# Altium PCB Slave_PCB.PcbDoc
Units mm, origin at the board's own origin, x right, y up, seen from the top; angles counter-clockwise.
Board outline 15 x 70 mm, 2 copper layers (Top Layer, Bottom Layer); 58 components, 46 nets, 211 pads, 250 vias.
Unrouted connection lines stored in the file: 1.
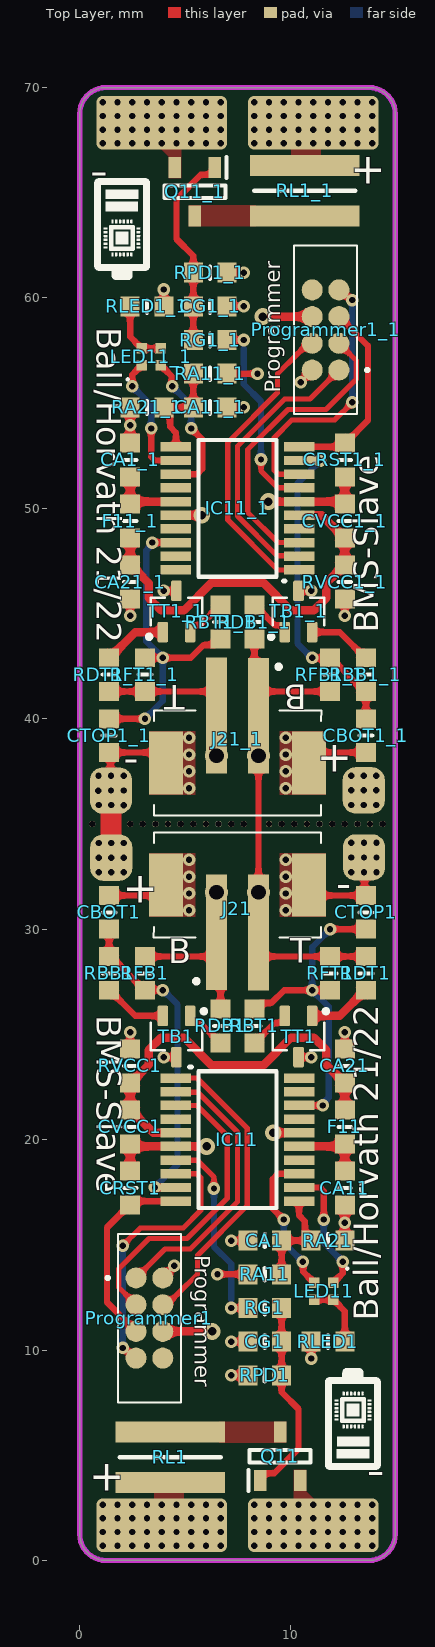
[diagram p0: Top Layer view]
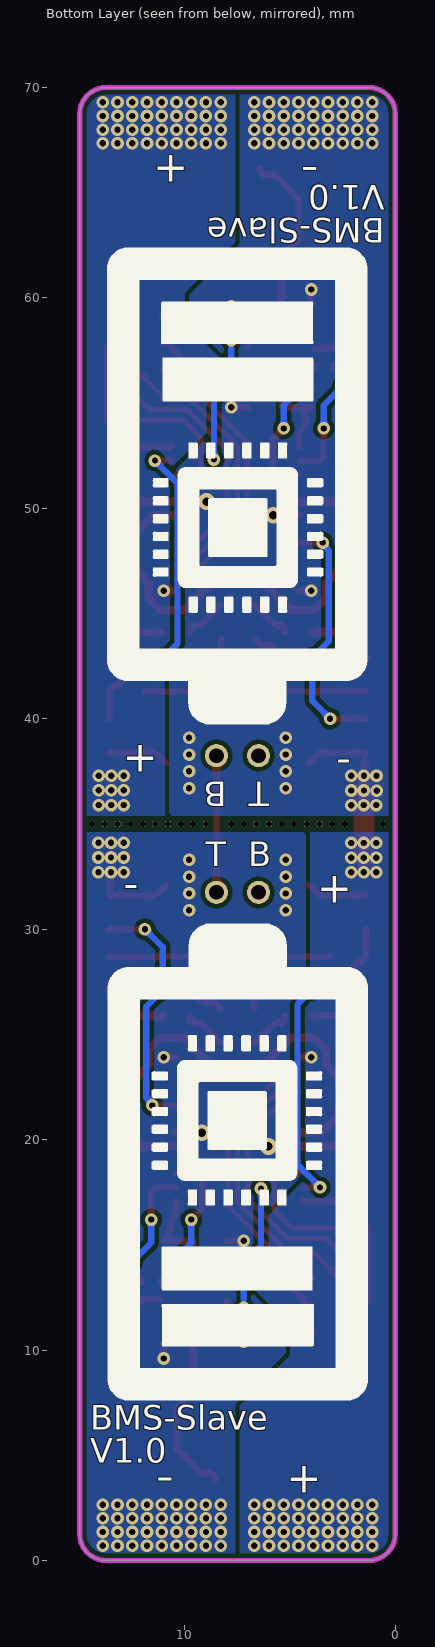
[diagram p1: Bottom Layer view, seen from below]
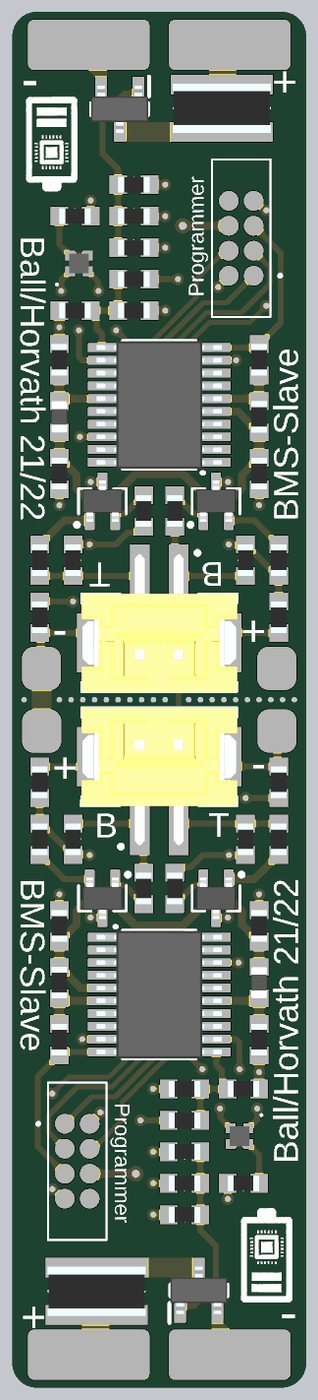
[diagram p2: 3D render of the assembled board from above, using the file's embedded part models]

## Layer stack, top to bottom
Top Solder: solder mask 0.0102, Solder Resist, Dk 3.5
Top Layer: signal copper 0.0356
Dielectric 1: dielectric 0.32, FR-4, Dk 4.8
Bottom Layer: signal copper 0.0356
Bottom Solder: solder mask 0.0102, Solder Resist, Dk 3.5

## Board outline
0,1.25 0,35 0,68.7 0,68.75 cw(c1.25,68.75) 1.25,70 13.75,70 cw(c13.75,68.75) 15,68.75 15,35 15,1.3 15,1.25 cw(c13.75,1.25) 13.75,0 1.25,0 cw(c1.25,1.25)

## Design rules (kind name [scope] priority, off if disabled: settings)
BoardOutlineClearance [All] p1: gap=0.2 ignorepadtopadclearanceinfootprint=FALSE except(0.4: Arc-SplitBarrior Arc-SplitContinuation Track-SplitBarrior Track-SplitContinuation SMDPad-SplitBarrior SMDPad-SplitContinuation THPad-SplitBarrior THPad-SplitContinuation Via-SplitBarrior Via-SplitContinuation Fill-SplitBarrior Fill-SplitContinuation Poly-SplitBarrior Poly-SplitContinuation Region-SplitBarrior Region-SplitContinuation Text-SplitBarrior Text-SplitContinuation)
Clearance "Stitching GND" [IsStitchingVia and InNet('GND') vs (IsVia and (Not IsStitchingVia)) Or IsPad] p1: gap=0.127 ignorepadtopadclearanceinfootprint=FALSE
Clearance "Clearance Bottom Layer" [OnLayer('Bottom Layer')] p2: gap=0.203 ignorepadtopadclearanceinfootprint=TRUE except(0.254: Arc-Text Track-Text SMDPad-Text THPad-Text Via-Text Fill-Text Poly-Text Region-Text Text-Text)
Clearance "Clearance Top Layer" [OnLayer('Top Layer')] p3: gap=0.203 ignorepadtopadclearanceinfootprint=TRUE except(0.254: Arc-Text Track-Text SMDPad-Text THPad-Text Via-Text Fill-Text Poly-Text Region-Text Text-Text)
Clearance [All] p4: gap=0.2 ignorepadtopadclearanceinfootprint=FALSE except(0.089: Arc-Arc Arc-Track Arc-SMDPad Track-Track Track-SMDPad SMDPad-SMDPad; 0.127: Arc-Via Track-Via SMDPad-Via THPad-Via Via-Via; 0.254: Arc-Text Track-Text SMDPad-Text THPad-Text Via-Text Fill-Text Poly-Text Region-Text Text-Text)
HoleSize [All] p1: absolutevalues=TRUE maxlimit=6.3 minlimit=0.2 maxpercent=80.000 minpercent=20.000
MinimumAnnularRing [All] p1: minimumring=0.076
MinimumSolderMaskSliver [All] p1: minsoldermaskwidth=0.1
PlaneConnect [All] p1: planeconnectstyle=Direct reliefexpansion=0.508 reliefentries=4 reliefconductorwidth=0.254 reliefairgap=0.254
PolygonConnect PolygonConnect_1 [All] p1: connectstyle=Direct reliefconductorwidth=0.508 reliefentries=4 polygonreliefangle="90 Angle" airgapwidth=0.254
RoutingCorners [All] p1: cornerstyle=Round minsetback=2.54 maxsetback=2.54
RoutingVias [All] p1: holewidth=0.5 width=1 viastyle="Through Hole" minholewidth=0.2 minwidth=0.45 maxholewidth=1 maxwidth=2
SilkToSilkClearance [All] p1: silktosilkclearance=0.1
SilkToSolderMaskClearance [IsPad] p1: minsilkscreentomaskgap=0.1 clearancetoexposedcopper=TRUE
SolderMaskExpansion [All] p1: expansion=0.05 istentingtop=FALSE
Width [All] p1: maxlimit=2.54 minlimit=0.089 preferedwidth=0.3
24 further rules are at their usual default settings.

## Classes and differential pairs
component class Slave_Schematic2: CA1_1 CA11_1 CA21_1 CBOT1_1 CG1_1 CRST1_1 CTOP1_1 CVCC1_1 F11_1 IC11_1 J21_1 LED11_1 Programmer1_1 Q11_1 RA11_1 RA21_1 RBB1_1 RBT1_1 RDB1_1 RDT1_1 RFB1_1 RFT1_1 RG1_1 RL1_1 RLED1_1 RPD1_1 RVCC1_1 TB1_1 TT1_1
component class Slave_Schematic: CA1 CA11 CA21 CBOT1 CG1 CRST1 CTOP1 CVCC1 F11 IC11 J21 LED11 Programmer1 Q11 RA11 RA21 RBB1 RBT1 RDB1 RDT1 RFB1 RFT1 RG1 RL1 RLED1 RPD1 RVCC1 TB1 TT1

## Components (designator, comment, footprint, x,y, rotation, side; value= is the part's Value field where it differs from the comment)
CA1 "Cap" 0603 8.8,15.2 r0 top value=100nF
CA1_1 "Cap" 0603 2.4,52.3 r270 top value=100pF (schematic designator CA12)
CA11 "Cap" 0603 12.6,17.7 r90 top value=100pF
CA11_1 "Cap" 0603 6.2,54.8 r180 top value=100nF (schematic designator CA2)
CA21 "Cap" 0603 12.6,23.5 r270 top value=100nF
CA21_1 "Cap" 0603 2.4,46.5 r90 top value=100nF (schematic designator CA22)
CBOT1 "Cap" 0603 1.4,30.8 r270 top value=100pF
CBOT1_1 "Cap" 0603 13.6,39.2 r90 top value=100pF (schematic designator CBOT2)
CG1 "Cap" 0603 8.8,10.4 r0 top value=100nF
CG1_1 "Cap" 0603 6.2,59.6 r180 top value=100nF (schematic designator CG2)
CRST1 "Cap" 0603 2.4,17.7 r270 top value=100nF
CRST1_1 "Cap" 0603 12.6,52.3 r90 top value=100nF (schematic designator CRST2)
CTOP1 "Cap" 0603 13.6,30.8 r270 top value=100pF
CTOP1_1 "Cap" 0603 1.4,39.2 r90 top value=100pF (schematic designator CTOP2)
CVCC1 "Cap" 0603 2.4,20.6 r90 top value=100nF
CVCC1_1 "Cap" 0603 12.6,49.4 r270 top value=100nF (schematic designator CVCC2)
F11 "BLM18" "0603 - BLM18AG102BH1D" 12.6,20.6 r90 top
F11_1 "BLM18" "0603 - BLM18AG102BH1D" 2.4,49.4 r270 top (schematic designator F12)
IC11 "ATTINY261A-SU" "TSSOP-20T (MO-153 AC)" 7.5,20 r0 top
IC11_1 "ATTINY261A-SU" "TSSOP-20T (MO-153 AC)" 7.5,50 r180 top (schematic designator IC12)
J21 "B2B-PH-SM4-TB_LF__SN_" JST-PHR 7.5,32.1 r0 top
J21_1 "B2B-PH-SM4-TB_LF__SN_" JST-PHR 7.5,37.9 r180 top (schematic designator J22)
LED11 "SML-P24" "1010 LED" 11.6,12.8 r180 top
LED11_1 "SML-P24" "1010 LED" 3.4,57.2 r0 top (schematic designator LED12)
Programmer1 "Connector 2x4" "PADS 2X4" 2.68,13.425 r270 top
Programmer1_1 "Connector 2x4" "PADS 2X4" 12.32,56.575 r90 top (schematic designator Programmer2)
Q11 "XP234N0801TR-G" "SOT-23 (TO-236)" 9.525,4.95 r90 top
Q11_1 "XP234N0801TR-G" "SOT-23 (TO-236)" 5.475,65.05 r270 top (schematic designator Q12)
RA11 "Res" 0603 8.8,13.6 r180 top value=100K
RA11_1 "Res" 0603 6.2,56.4 r0 top value=100K (schematic designator RA12)
RA21 "Res" 0603 11.8,15.2 r180 top value=100K
RA21_1 "Res" 0603 3.2,54.8 r0 top value=100K (schematic designator RA22)
RBB1 "Res" 0603 1.4,27.9 r270 top value=470K
RBB1_1 "Res" 0603 13.6,42.1 r90 top value=470K (schematic designator RBB2)
RBT1 "Res" 0603 8.3,25.4 r270 top value=470K
RBT1_1 "Res" 0603 6.7,44.6 r90 top value=470K (schematic designator RBT2)
RDB1 "Res" 0603 6.7,25.4 r270 top value=10K
RDB1_1 "Res" 0603 8.3,44.6 r90 top value=10K (schematic designator RDB2)
RDT1 "Res" 0603 13.6,27.9 r90 top value=10K
RDT1_1 "Res" 0603 1.4,42.1 r270 top value=10K (schematic designator RDT2)
RFB1 "Res" 0603 3.1,27.9 r90 top value=100K
RFB1_1 "Res" 0603 11.9,42.1 r270 top value=100K (schematic designator RFB2)
RFT1 "Res" 0603 11.9,27.9 r90 top value=100K
RFT1_1 "Res" 0603 3.1,42.1 r270 top value=100K (schematic designator RFT2)
RG1 "Res" 0603 8.8,12 r0 top value=1k
RG1_1 "Res" 0603 6.2,58 r180 top value=1k (schematic designator RG2)
RL1 "Res" "1020 (REVERSED)" 4.3,4.9 r270 top value=36R
RL1_1 "Res" "1020 (REVERSED)" 10.7,65.1 r90 top value=36R (schematic designator RL2)
RLED1 "Res" 0603 11.8,10.4 r0 top value=1k
RLED1_1 "Res" 0603 3.2,59.6 r180 top value=1k (schematic designator RLED2)
RPD1 "Res" 0603 8.8,8.8 r0 top value=100k
RPD1_1 "Res" 0603 6.2,61.2 r180 top value=100k (schematic designator RPD2)
RVCC1 "Res" 0603 2.4,23.5 r90 top value=47R
RVCC1_1 "Res" 0603 12.6,46.5 r270 top value=47R (schematic designator RVCC2)
TB1 "BC585BWT1G" "SOT-323 (SC-70)" 4.6,24.9 r270 top
TB1_1 "BC585BWT1G" "SOT-323 (SC-70)" 10.4,45.1 r90 top (schematic designator TB2)
TT1 "PDTC143TU" "SOT-323 (SC-70)" 10.4,24.9 r270 top
TT1_1 "PDTC143TU" "SOT-323 (SC-70)" 4.6,45.1 r90 top (schematic designator TT2)

## Footprints (in the part's own frame and the unit in brackets; to place one, negate y for a bottom-side part, rotate by r counter-clockwise, add the part's x,y. Pads: shape width x height; smd on the part's side, far side on the other; paste and mask are expansions set on the pad)
0603 [mm] "1608 Metric"
  rect 0.9x0.95 smd: 1(-0.8,0) 2(0.8,0)
  silkscreen extent 0,-0.3 0,0.3, body extent -0.8,-0.4 0.8,0.4, height 0.55
"0603 - BLM18AG102BH1D" [mm]
  rect 0.9x0.95 smd: 1(-0.8,0) 2(0.8,0)
  silkscreen extent 0,-0.3 0,0.3, body extent -0.8,-0.4 0.8,0.4, height 0.8
"1010 LED" [mm] "SMLP24MUWT86R"
  rect 0.5x0.5 smd: 1(-0.45,-0.4) 2(0.45,-0.4) 3(0.45,0.4) 4(-0.45,0.4)
  silkscreen extent -1.17,-1.12 -1.07,-1.02, body extent -0.5,-0.5 0.5,0.5, height 0.35
"1020 (REVERSED)" [mm]
  rect 1x5.2 smd: 1(-1.2,0) 2(1.2,0)
  silkscreen extent 0,-2.4 0,2.4, body extent -1.25,-2.5 1.25,2.5, height 0.73
JST-PHR [mm]
  rect 1x5.5 smd: 1(-1,-2.25) 2(0.991,-2.261)
  rect 1.6x3 smd: 3(-3.4,0) 4(3.4,0)
  silkscreen extent -4,-4.67 3.98,2.5, body extent -3.97,-4.5 3.97,2.5, height 6.8
"PADS 2X4" [mm]
  round 1 smd: 1(0,0) 2(0,1.27) 3(1.27,0) 4(1.27,1.27) 5(2.54,0) 6(2.54,1.27) 7(3.81,0) 8(3.81,1.27)
  silkscreen extent -2.09,-1.4 5.91,2.13
"SOT-23 (TO-236)" [mm]
  rect 1x0.6 smd: 1(-1.15,0.95) 2(-1.15,-0.95) 3(1.15,0)
  silkscreen extent -1.65,-1.45 0.3,1.5, body extent -1.2,-1.45 1.2,1.45, height 1.15
"SOT-323 (SC-70)" [mm]
  rrect25% 0.97x0.5 smd: 1(-0.98,0.65) 2(-0.98,-0.65) 3(0.98,0)
  silkscreen extent -1.3,-1.22 0.65,1.4, body extent -1.05,-1 1.05,1, height 1.1
"TSSOP-20T (MO-153 AC)" [mm]
  rect 1.45x0.45 smd: 1(-2.925,2.925) 2(-2.925,2.275) 3(-2.925,1.625) 4(-2.925,0.975) 5(-2.925,0.325) 6(-2.925,-0.325) 7(-2.925,-0.975) 8(-2.925,-1.625) 9(-2.925,-2.275) 10(-2.925,-2.925) 11(2.925,-2.925) 12(2.925,-2.275) 13(2.925,-1.625) 14(2.925,-0.975) 15(2.925,-0.325) 16(2.925,0.325) 17(2.925,0.975) 18(2.925,1.625) 19(2.925,2.275) 20(2.925,2.925)
  silkscreen extent -2.26,-3.25 1.85,3.45, body extent -3.2,-3.25 3.2,3.25, height 1.2

## Part data
CA1 CA1_1 CA11 CA11_1 CA21 CA21_1 CBOT1 CBOT1_1 CG1 CG1_1 CRST1 CRST1_1 CTOP1 CTOP1_1 CVCC1 CVCC1_1: "Capacitor", LatestRevisionDate=17-Jul-2002, LatestRevisionNote="Re-released for DXP Platform.", PackageDescription="Radial Cap, Thru-Hole; 2 Leads; 0.3 in Pin Spacing", PackageReference=RAD-0.3, Published=8-Jun-2000, Publisher="Altium Limited"
F11 F11_1: "Filter"
IC11 IC11_1: "Integrated Circuit", Manufacturer_Name=Microchip, Mouser Part Number=556-ATTINY261A-SU, Arrow Part Number=ATTINY261A-SU, Arrow Price/Stock=https://www.arrow.com/en/products/attiny261a-su/microchip-technology, Datasheet Link=http://www.atmel.com/Images/doc8197.pdf, Height=2.65mm, Manufacturer_Part_Number=ATTINY261A-SU, Mouser Price/Stock=https://www.mouser.co.uk/ProductDetail/Microchip-Technology-Atmel/ATTINY261A-SU?qs=LHmEVA8xxfYkt4Dy%2F2AOtw%3D%3D
J21 J21_1: "Connector", Manufacturer_Name="JST (JAPAN SOLDERLESS TERMINALS)", Manufacturer_Part_Number=B2B-PH-SM4-TB(LF)(SN), Datasheet Link=http://www.jst-mfg.com/product/pdf/eng/ePH.pdf, Height=6.6mm
LED11 LED11_1: "Dual Color LED", Manufacturer_Name="ROHM Semiconductor", Manufacturer_Part_Number=SML-P24MUWT86R, Mouser Part Number=755-SML-P24MUWT86R, Datasheet Link=https://www.rohm.com/datasheet/SML-P24MUW(R)/sml-p24muw-e, Height=0.25mm, Mouser Price/Stock=https://www.mouser.co.uk/ProductDetail/ROHM-Semiconductor/SML-P24MUWT86R?qs=SP2aZMzhwxgr8eZ6SbTI9w%3D%3D
Programmer1 Programmer1_1: "Connector 1,27mm", Manufacturer_Name=Mill-Max, Manufacturer_Part_Number=855-22-008-10-001101, Mouser Part Number=575-855-22-008-10, Datasheet Link=https://componentsearchengine.com/Datasheets/2/855-22-008-10-001101.pdf, Height=6.27mm, Mouser Price/Stock=https://www.mouser.co.uk/ProductDetail/Mill-Max/855-22-008-10-001101?qs=mPCt1EmoOdQMosTdRU7w4Q%3D%3D
Q11 Q11_1: "MOSFET (N-Channel)", Manufacturer_Name=Torex, Mouser Part Number=865-XP234N0801TR-G, Datasheet Link=https://4donline.ihs.com/images/VipMasterIC/IC/TOSL/TOSL-S-A0008892481/TOSL-S-A0008892481-1.pdf?hkey=CECEF36DEECDED6468708AAF2E19C0C6, Height=1.15mm, Manufacturer_Part_Number=XP234N0801TR-G, Mouser Price/Stock=https://www.mouser.co.uk/ProductDetail/Torex-Semiconductor/XP234N0801TR-G?qs=BJlw7L4Cy7%252BWe%2FbHvnXcKQ%3D%3D
RA11 RA11_1 RA21 RA21_1 RBB1 RBB1_1 RBT1 RBT1_1 RDB1 RDB1_1 RDT1 RDT1_1 RFB1 RFB1_1 RFT1 RFT1_1 RG1 RG1_1 RL1 RL1_1 RLED1 RLED1_1 RPD1 RPD1_1 RVCC1 RVCC1_1: "Resistor", LatestRevisionDate=17-Jul-2002, LatestRevisionNote="Re-released for DXP Platform.", PackageDescription="Axial Device, Thru-Hole; 2 Leads; 0.4 in Pin Spacing", PackageReference=AXIAL-0.4, Published=8-Jun-2000, Publisher="Altium Limited"
TB1 TB1_1: "PNP", LatestRevisionDate=29-May-2009, LatestRevisionNote="IPC-7351 Footprint Added.", PackageDescription="3-Pin SOT-23 Package 0.95 mm Pitch, 2.4 mm Lead Span", PackageReference=SOT-23B, PackageVersion=Aug-1999, Published=8-Jun-2000, Publisher="Altium Limited"
TT1 TT1_1: "NPN", Code_JEDEC=TO-226-AA, LatestRevisionDate=17-Jul-2002, LatestRevisionNote="Re-released for DXP Platform.", PackageDescription="TO, Flat Index; 3 In-Line, Axial Leads; Body Dia. 4.8mm; Leads 0.55 x 0.51 mm (max)", PackageReference=TO-226-AA, Published=8-Jun-2000, Publisher="Altium Limited"

## Free pads (board coordinates)
  round 0.3 hole 0.3 unplated mask+0: 2(0.6,35) 2(2.4,35) 2(3,35) 2(3.6,35) 2(4.2,35) 2(4.8,35) 2(5.4,35) 2(6,35) 2(6.6,35) 2(7.2,35) 2(7.8,35) 2(9,35) 2(9.6,35) 2(10.2,35) 2(10.8,35) 2(11.4,35) 2(12,35) 2(12.6,35) 2(13.2,35) 2(13.8,35) 2(14.4,35)
  round 1.1 hole 0.7: 3(6.5,31.75) 3(6.5,38.25) 3(8.5,31.75) 3(8.5,38.25)
  rrect60% 2x2.2 smd: ""(1.491,36.589) ""(1.5,33.4) ""(13.5,36.6) ""(13.509,33.411)
  rrect25% 6.2x2.55 smd: ""(3.9,1.68) ""(3.9,68.32) ""(11.1,1.68) ""(11.1,68.32)

## Via types
v1: diameter 0.6, hole 0.3, Top Layer to Bottom Layer, tented both sides, 244 vias
v2: diameter 0.8, hole 0.4, Top Layer to Bottom Layer, tented both sides, 6 vias

## Nets (pads, with @x,y where several pads share a name; then routed paths per layer and width w, separated by ;. In a path a pad name is that pad's centre, name@x,y a point inside that pad or via, vN(x,y) a via of type N, cw(c..) or ccw(c..) an arc to the next point about the centre after c; other vN are vias at no path point)
AVCCBOT: CA11.2 F11.1 IC11.15 | length 3.5
  Top Layer w0.4: IC11.15 12.475,19.675 F11.1 CA11.2
AVCCTOP: CA1_1.2 F11_1.1 IC11_1.15 | length 3.5
  Top Layer w0.4: CA1_1.2 F11_1.1 2.525,50.325 IC11_1.15
Balancing1: IC11.7 RG1.1 | length 9.1
  Top Layer w0.254: IC11.7 5.575,19.025 6.38,18.22 v1(6.38,17.677)
  Top Layer w0.3: v1(7.2,12) RG1.1 ; RG1.1@8,12.3 RG1.1@8,12.325
  Bottom Layer w0.3: v1(6.38,17.677) 6.38,14.92 7.2,14.1 7.2,12.4
Balancing2: IC11_1.7 RG1_1.1 | length 9.1
  Top Layer w0.254: v1(8.62,52.323) 8.62,51.78 9.425,50.975 IC11_1.7
  Top Layer w0.3: RG1_1.1@7,57.675 RG1_1.1@7,57.7 ; RG1_1.1 v1(7.8,58)
  Bottom Layer w0.3: 7.8,57.6 7.8,55.9 8.62,55.08 v1(8.62,52.323)
Bot-RTX: J21.1 pad.3@6.5,31.75 RDB1.1 RFB1.2 | length 8.1
  Top Layer w0.3: RFB1.2 6.15,28.7 6.5,29.05 J21.1 6.7,29.65 RDB1.1
Bot-Slave: CBOT1.2 IC11.9 RBB1.1 RFB1.1 | length 15.5
  Top Layer w0.3: CBOT1.2 RBB1.1 1.7,28.4 1.775,28.4 3.075,27.1 RFB1.1 3.125,27.125 v1@3.95,27.125 ; v1(3.576,17.728) 3.577,17.727 4.373,17.727 IC11.9@4.375,17.725
  Bottom Layer w0.3: v1(3.576,17.728) 4.65,18.803 4.65,26.425 v1@3.95,27.125
  other v1: 3.95,27.1
Cell_Voltage1: CA1.2 IC11.11 RA11.1 RA21.2 | length 5.1
  Top Layer w0.3: RA11.1 CA1.2 RA21.2 10.7,15.5 10.7,16.125 10.425,16.4 IC11.11
Cell_Voltage2: CA11_1.2 IC11_1.11 RA11_1.1 RA21_1.2 | length 5.1
  Top Layer w0.3: IC11_1.11 4.575,53.6 4.3,53.875 4.3,54.5 RA21_1.2 CA11_1.2 RA11_1.1
Debug1: IC11.8 Programmer1.7 | length 12.9
  Top Layer w0.254: v1(2.041,14.959) 2.881,15.8 4.921,15.8 5.75,16.629 5.75,18.203 5.578,18.375 IC11.8
  Top Layer w0.3: v1(2.041,10.1) 2.118,10.1 2.603,9.615 Programmer1.7
  Bottom Layer w0.3: v1(2.041,10.1) v1(2.041,14.959)
Debug2: IC11_1.8 Programmer1_1.7 | length 12.9
  Top Layer w0.254: IC11_1.8 9.422,51.625 9.25,51.797 9.25,53.371 10.079,54.2 12.119,54.2 v1(12.959,55.041)
  Top Layer w0.3: Programmer1_1.7 12.397,60.385 12.882,59.9 v1(12.959,59.9)
  Bottom Layer w0.3: v1(12.959,55.041) v1(12.959,59.9)
GND: CA1.1 CA11.1 CA21.1 CBOT1.1 CG1.1 CRST1.1 CTOP1.1 CVCC1.1 IC11.6 IC11.16 J21.3 J21.4 pad.@11.1,1.68 pad.@13.509,33.411 Programmer1.6 Q11.2 RA21.1 RLED1.1 RPD1.1 TT1.3 | length 21.8
  Top Layer w0.3: CBOT1.1 3.6,31.6 J21.3 ; v1(7.2,10.4) CG1.1 ; v1(7.2,15.2) CA1.1 ; TT1.3@10.402,23.922 TT1.3 v1(11,23.92) ; J21.4 11.4,31.6 CTOP1.1 13.535,31.665 13.535,32.685 v1(13.509,32.711) ; v1(11,9.6) RLED1.1 ; CA21.1 v1(12.6,25.1)
  Top Layer w0.4: CRST1.1 CVCC1.1 2.525,19.675 IC11.6 v2(6.03,19.675) ; Programmer1.6 v2(6.3,10.885) ; v1(7.2,8.8) RPD1.1 ; v2(9.2,20.325) IC11.16 ; RA21.1 v1(12.6,16.05) CA11.1
  other v1: 8.3,0.7 9,0.7 9.7,0.7 10.4,0.7 11.1,0.7 11.8,0.7 12.5,0.7 13.2,0.7 13.9,0.7 8.3,1.35 9,1.35 9.7,1.35 10.4,1.35 11.1,1.35 11.8,1.35 12.5,1.35 13.2,1.35 13.9,1.35 8.3,2 9,2 9.7,2 10.4,2 11.1,2 11.8,2 12.5,2 13.2,2 13.9,2 8.3,2.65 9,2.65 9.7,2.65 10.4,2.65 11.1,2.65 11.8,2.65 12.5,2.65 13.2,2.65 13.9,2.65 5.2,30.9 9.8,30.9 5.2,31.7 9.8,31.7 5.2,32.5 9.8,32.5 12.909,32.711 14.109,32.711 5.2,33.3 9.8,33.3 12.909,33.411 13.509,33.411 14.109,33.411 12.909,34.111 13.509,34.111 14.109,34.111
Mid-RTX: J21.2 J21_1.1 pad.3@8.5,31.75 pad.3@8.5,38.25 RDB1_1.1 RDT1.2 RFB1_1.2 RFT1.2 | length 20.6
  Top Layer w0.3: RDB1_1.1 8.3,40.35 J21_1.1 8.5,40.95 8.85,41.3 RFB1_1.2 ; J21.2 8.491,29.05 8.841,28.7 RFT1.2 RDT1.2 ; J21.2@8.5,31.75 8.497,31.753 8.497,38.247 J21_1.1@8.5,38.25
Mid-Slave1: CTOP1.2 IC11.18 RBT1.1 RFT1.1 | length 16
  Top Layer w0.3: RBT1.1 8.6,26.5 9.119,26.5 9.719,27.1 v1(11.05,27.1) RFT1.1 ; IC11.18 v1(11.55,21.625) ; v1(11.9,30) CTOP1.2
  Bottom Layer w0.3: v1(11.55,21.625) 11.55,21.706 11.835,21.991 11.835,26.315 v1(11.05,27.1) 11.05,29.15 v1(11.9,30)
Mid-Slave2: CBOT1_1.2 IC11_1.9 RBB1_1.1 RFB1_1.1 | length 15.5
  Top Layer w0.3: IC11_1.9@10.625,52.275 10.627,52.273 11.423,52.273 v1(11.424,52.272) ; v1@11.05,42.875 11.875,42.875 RFB1_1.1 11.925,42.9 13.225,41.6 13.3,41.6 RBB1_1.1 CBOT1_1.2
  Bottom Layer w0.3: v1@11.05,42.875 10.35,43.575 10.35,51.197 v1(11.424,52.272)
  other v1: 11.05,42.9
MISO1: IC11.2 Programmer1.1 | length 13.3
  Top Layer w0.254: Programmer1.1 4.055,14.8 5.255,14.8 7.502,17.047 7.502,20.361 5.609,22.254 ; IC11.2 4.596,22.254 5.596,22.254
MISO2: IC11_1.2 Programmer1_1.1 | length 13.3
  Top Layer w0.254: 9.391,47.746 7.498,49.639 7.498,52.953 9.745,55.2 10.945,55.2 Programmer1_1.1 ; 9.404,47.746 10.404,47.746 IC11_1.2
MOSI1: IC11.1 Programmer1.4 | length 14.5
  Top Layer w0.254: Programmer1.4 4.152,12.155 4.654,12.657 4.657,12.657 5.6,13.6 5.6,14.498 7.959,16.858 7.959,20.551 5.585,22.925 ; IC11.1 5.575,22.925
MOSI2: IC11_1.1 Programmer1_1.4 | length 14.5
  Top Layer w0.254: 9.415,47.075 7.041,49.449 7.041,53.142 9.4,55.502 9.4,56.4 10.343,57.343 10.346,57.343 10.848,57.845 Programmer1_1.4 ; 9.425,47.075 IC11_1.1
NetCG1_1_2: CG1_1.2 Q11_1.1 RG1_1.2 RPD1_1.2 | length 9.6
  Top Layer w0.3: RG1_1.2 CG1_1.2 RPD1_1.2 5.4,62 4.6,62.8 4.6,64.7 5.75,65.85 6.275,65.85 6.425,66 Q11_1.1
NetCG1_2: CG1.2 Q11.1 RG1.2 RPD1.2 | length 9.6
  Top Layer w0.3: Q11.1 8.575,4 8.725,4.15 9.25,4.15 10.4,5.3 10.4,7.2 9.6,8 RPD1.2 CG1.2 RG1.2
NetLED11_1_3: LED11_1.3 LED11_1.4 RLED1_1.2 | length 3.1
  Top Layer w0.3: RLED1_1.2 2.4,58.15 LED11_1.4 LED11_1.3
NetLED11_3: LED11.3 LED11.4 RLED1.2 | length 3.1
  Top Layer w0.3: LED11.3 LED11.4 12.6,11.85 RLED1.2
NetQ11_1_3: Q11_1.3 RL1_1.1
NetQ11_3: Q11.3 RL1.1
NetRBB1_1_2: RBB1_1.2 TB1_1.2 | length 3.1
  Top Layer w0.3: TB1_1.2 12.355,44.12 13.575,42.9 RBB1_1.2
NetRBB1_2: RBB1.2 TB1.2 | length 3.1
  Top Layer w0.3: RBB1.2 1.425,27.1 2.645,25.88 TB1.2
NetRBT1_1_2: RBT1_1.2 TT1_1.2 | length 2.1
  Top Layer w0.3: TT1_1.2 5.25,44.355 5.35,44.455 5.73,44.455 6.675,45.4 RBT1_1.2
NetRBT1_2: RBT1.2 TT1.2 | length 2.1
  Top Layer w0.3: RBT1.2 8.325,24.6 9.27,25.545 9.65,25.545 9.75,25.645 TT1.2
NetRDB1_1_2: RDB1_1.2 TB1_1.1 | length 2.1
  Top Layer w0.3: RDB1_1.2 8.325,45.4 9.27,44.455 9.65,44.455 9.75,44.355 TB1_1.1
NetRDB1_2: RDB1.2 TB1.1 | length 2.1
  Top Layer w0.3: TB1.1 5.25,25.645 5.35,25.545 5.73,25.545 6.675,24.6 RDB1.2
NetRDT1_1: RDT1.1 TT1.1 | length 3.1
  Top Layer w0.4: TT1.1 12.355,25.88 13.575,27.1 RDT1.1
NetRDT1_1_1: RDT1_1.1 TT1_1.1 | length 3.1
  Top Layer w0.4: RDT1_1.1 1.425,42.9 2.645,44.12 TT1_1.1
RST1: CRST1.2 IC11.10 Programmer1.5 | length 9.1
  Top Layer w0.3: Programmer1.5 1.3,12.265 1.3,15.825 2.375,16.9 CRST1.2 2.575,17.075 IC11.10@4.375,17.075
RST2: CRST1_1.2 IC11_1.10 Programmer1_1.5 | length 9.1
  Top Layer w0.3: IC11_1.10@10.625,52.925 12.425,52.925 CRST1_1.2 12.625,53.1 13.7,54.175 13.7,57.735 Programmer1_1.5
SCK1: IC11.3 Programmer1.3 | length 14.6
  Top Layer w0.254: Programmer1.3 1.85,12.985 1.85,13.85 3.3,15.3 5.1,15.3 7.011,17.211 7.011,20.189 5.575,21.625 IC11.3
SCK2: IC11_1.3 Programmer1_1.3 | length 14.6
  Top Layer w0.254: IC11_1.3 9.425,48.375 7.989,49.811 7.989,52.789 9.9,54.7 11.7,54.7 13.15,56.15 13.15,57.015 Programmer1_1.3
Status_G1: IC11.12 LED11.1 | length 6.2
  Top Layer w0.3: IC11.12 11.425,17.725 11.6,17.55 v1(11.6,16.2) ; LED11.1 12.5,13.65 v1(12.5,14.2)
  Bottom Layer w0.3: v1(11.6,16.2) 11.6,15.1 v1(12.5,14.2)
Status_G2: IC11_1.12 LED11_1.1 | length 6.2
  Top Layer w0.3: v1(2.5,55.8) 2.5,56.35 LED11_1.1 ; v1(3.4,53.8) 3.4,52.45 3.575,52.275 IC11_1.12
  Bottom Layer w0.3: v1(2.5,55.8) 3.4,54.9 v1(3.4,53.8)
Status_R1: IC11.13 LED11.2 | length 7.2
  Top Layer w0.3: v1@9.691,16.2 v1(9.7,16.2) ; v1@9.772,16.2 v1(9.7,16.2) ; IC11.13 9.425,18.375 9.175,18.125 9.175,16.725 v1(9.7,16.2) ; v1(10.6,14.2) 10.626,14.174 10.626,13.724 LED11.2
  Bottom Layer w0.3: v1(9.7,16.2) 9.7,15.1 v1(10.6,14.2)
Status_R2: IC11_1.13 LED11_1.2 | length 7.2
  Top Layer w0.3: LED11_1.2 4.374,56.276 4.374,55.826 v1(4.4,55.8) ; IC11_1.13 5.575,51.625 5.825,51.875 5.825,53.275 v1(5.3,53.8) ; v1@5.228,53.8 v1(5.3,53.8) ; v1@5.309,53.8 v1(5.3,53.8)
  Bottom Layer w0.3: v1(4.4,55.8) 5.3,54.9 v1(5.3,53.8)
Top-RTX: J21_1.2 pad.3@6.5,38.25 RDT1_1.2 RFT1_1.2 | length 6
  Top Layer w0.3: RDT1_1.2 RFT1_1.2 6.159,41.3 6.509,40.95 J21_1.2
Top-Slave: CTOP1_1.2 IC11_1.18 RBT1_1.1 RFT1_1.1 | length 16
  Top Layer w0.3: CTOP1_1.2 v1(3.1,40) ; RFT1_1.1 v1(3.95,42.9) 5.281,42.9 5.881,43.5 6.4,43.5 RBT1_1.1 ; v1(3.45,48.375) IC11_1.18
  Bottom Layer w0.3: v1(3.1,40) 3.95,40.85 v1(3.95,42.9) 3.165,43.685 3.165,48.009 3.45,48.294 v1(3.45,48.375)
VCCBOT: CA1_1.1 CA11_1.1 CA21_1.1 CBOT1_1.1 CG1_1.1 CRST1_1.1 CTOP1_1.1 CVCC1_1.1 IC11_1.6 IC11_1.16 J21_1.3 J21_1.4 pad.@1.5,33.4 pad.@1.491,36.589 pad.@3.9,1.68 pad.@3.9,68.32 Programmer1.2 Programmer1_1.6 Q11_1.2 RA11.2 RA21_1.1 RL1.2 RLED1_1.1 RPD1_1.1 RVCC1.2 TB1.3 TT1_1.3 | length 28.7
  Top Layer w0.3: v1(1.491,36.589) pad.@1.495,36.585 ; v1(1.491,37.289) 1.465,37.315 1.465,38.335 CTOP1_1.1 3.6,38.4 J21_1.4 ; pad.@1.495,33.405 v1(1.5,33.4) ; RVCC1.2 v1(2.4,25.1) v1@2.4,25.125 ; v1(2.4,44.9) CA21_1.1 ; Programmer1.2 3.95,13.439 4.5,13.989 v1(4.5,14.002) ; v1(3.997,23.92) TB1.3 ; v1(4,46.08) TT1_1.3 TT1_1.3@4.598,46.078 ; RLED1_1.1 v1(4,60.4) ; v1(6.547,13.6) RA11.2 ; CA11_1.1 v1(7.8,54.8) ; CG1_1.1 v1(7.8,59.6) ; J21_1.3 11.4,38.4 CBOT1_1.1
  Top Layer w0.4: CA1_1.1 v1(2.4,53.95) RA21_1.1 ; IC11_1.16 v2(5.8,49.675) ; RPD1_1.1 v1(7.8,61.2) ; v2(8.7,59.115) Programmer1_1.6 ; v2(8.97,50.325) IC11_1.6 12.475,50.325 CVCC1_1.1 CRST1_1.1
  Top Layer w1: pad.@1.495,33.405 1.495,34.1 pad.@1.495,36.585
  other v1: 1.1,0.7 1.8,0.7 2.5,0.7 3.2,0.7 3.9,0.7 4.6,0.7 5.3,0.7 6,0.7 6.7,0.7 1.1,1.35 1.8,1.35 2.5,1.35 3.2,1.35 3.9,1.35 4.6,1.35 5.3,1.35 6,1.35 6.7,1.35 1.1,2 1.8,2 2.5,2 3.2,2 3.9,2 4.6,2 5.3,2 6,2 6.7,2 1.1,2.65 1.8,2.65 2.5,2.65 3.2,2.65 3.9,2.65 4.6,2.65 5.3,2.65 6,2.65 6.7,2.65 0.9,32.7 1.5,32.7 2.1,32.7 0.9,33.4 2.1,33.4 0.9,34.1 1.5,34.1 2.1,34.1 0.9,35.9 1.5,35.9 2.091,35.889 0.883,36.587 2.091,36.589 5.2,36.7 9.8,36.7 0.891,37.289 2.091,37.289 5.2,37.5 9.8,37.5 5.2,38.3 9.8,38.3 5.2,39.1 9.8,39.1 1.1,67.35 1.8,67.35 2.5,67.35 3.2,67.35 3.9,67.35 4.6,67.35 5.3,67.35 6,67.35 6.7,67.35 1.1,68 1.8,68 2.5,68 3.2,68 3.9,68 4.6,68 5.3,68 6,68 6.7,68 1.1,68.65 1.8,68.65 2.5,68.65 3.2,68.65 3.9,68.65 4.6,68.65 5.3,68.65 6,68.65 6.7,68.65 1.1,69.3 1.8,69.3 2.5,69.3 3.2,69.3 3.9,69.3 4.6,69.3 5.3,69.3 6,69.3 6.7,69.3
VCCTOP: pad.@11.1,68.32 pad.@13.5,36.6 Programmer1_1.2 RA11_1.2 RL1_1.2 RVCC1_1.2 TB1_1.3 | length 3.7
  Top Layer w0.3: RA11_1.2 v1(8.453,56.4) ; TB1_1.3 v1(11.003,46.08) ; v1(10.5,55.998) 10.5,56.011 11.05,56.561 Programmer1_1.2 ; v1@12.6,44.875 v1(12.6,44.9) RVCC1_1.2
  other v1: 12.9,35.9 13.5,35.9 14.1,35.9 12.9,36.6 13.5,36.6 14.1,36.6 12.9,37.3 13.5,37.3 14.1,37.3 8.3,67.35 9,67.35 9.7,67.35 10.4,67.35 11.1,67.35 11.8,67.35 12.5,67.35 13.2,67.35 13.9,67.35 8.3,68 9,68 9.7,68 10.4,68 11.1,68 11.8,68 12.5,68 13.2,68 13.9,68 8.3,68.65 9,68.65 9.7,68.65 10.4,68.65 11.1,68.65 11.8,68.65 12.5,68.65 13.2,68.65 13.9,68.65 8.3,69.3 9,69.3 9.7,69.3 10.4,69.3 11.1,69.3 11.8,69.3 12.5,69.3 13.2,69.3 13.9,69.3
VCCUCBOT: CA21.2 CVCC1.2 F11.2 IC11.5 RVCC1.1 | length 19.1
  Top Layer w0.4: IC11.5 3.5,20.325 2.425,21.4 CVCC1.2 RVCC1.1 2.425,22.7 3.278,23.553 3.278,24.253 3.875,24.85 4.95,24.85 6.275,23.525 8.725,23.525 10.05,24.85 11.125,24.85 11.722,24.253 11.722,23.553 12.575,22.7 CA21.2 F11.2 F11.2@12.575,21.4
VCCUCTOP: CA21_1.2 CVCC1_1.2 F11_1.2 IC11_1.5 RVCC1_1.1 | length 19.1
  Top Layer w0.4: F11_1.2@2.425,48.6 F11_1.2 CA21_1.2 2.425,47.3 3.278,46.447 3.278,45.747 3.875,45.15 4.95,45.15 6.275,46.475 8.725,46.475 10.05,45.15 11.125,45.15 11.722,45.747 11.722,46.447 12.575,47.3 RVCC1_1.1 CVCC1_1.2 12.575,48.6 11.5,49.675 IC11_1.5
pads on no net: IC11.4 IC11.14 IC11.17 IC11.19 IC11.20 IC11_1.4 IC11_1.14 IC11_1.17 IC11_1.19 IC11_1.20 Programmer1.8 Programmer1_1.8

## Polygon pours and split planes (outlines as drawn)
VCCBOT on Bottom Layer "VCCBOT_L02_P045" (solid, remove dead copper, pour order 45): 15,35.4 15,70 0,70 0,35.4
VCCTOP on Bottom Layer "VCCTOP_L02_P044" (solid, remove dead copper, pour order 44): 10,60.25 10,57.7 10,58.8 8.1,56.9 8.1,54.475 10.55,52.025 10.55,42.55 10.95,42.15 10.95,35.4 15,35.4 15,70 7.6,70 7.6,62.65
VCCBOT on Bottom Layer "VCCBOT_L02_P002" (solid, remove dead copper, pour order 2): 5,9.75 5,12.3 5,11.2 6.9,13.1 6.9,15.525 4.45,17.975 4.45,27.45 4.05,27.85 4.05,34.6 0,34.6 0,0 7.4,0 7.4,7.35
GND on Bottom Layer "GND_L02_P006" (solid, remove dead copper, pour order 6): 0,34.6 0,0 15,0 15,34.6
VCCBOT on Top Layer "VCCBOT_L01_P046" (solid, pour order 46): 11.7,36.4 9.5,36.4 9.5,39.4 11.7,39.4
NetQ11_1_3 on Top Layer "NETQ11_1_3_L01_P050" (solid, pour order 50): 8.375,63.4 5.175,63.4 5.175,64.4 8.375,64.4
VCCBOT on Top Layer "VCCBOT_L01_P049" (solid, pour order 49): 4.825,67.2 4.825,65.7 4.225,65.7 4.225,66.7 3.725,67.2
VCCTOP on Top Layer "VCCTOP_L01_P048" (solid, pour order 48): 11.45,67.35 10.05,67.35 10.05,66.075 11.45,66.075
VCCBOT on Top Layer "VCCBOT_L01_P047" (solid, pour order 47): 5.5,36.4 3.3,36.4 3.3,39.4 5.5,39.4
NetQ11_3 on Top Layer "NETQ11_3_L01_P036" (solid, pour order 36): 6.625,6.6 9.825,6.6 9.825,5.6 6.625,5.6
GND on Top Layer "GND_L01_P035" (solid, pour order 35): 10.175,2.8 10.175,4.3 10.775,4.3 10.775,3.3 11.275,2.8
VCCBOT on Top Layer "VCCBOT_L01_P034" (solid, pour order 34): 3.55,2.65 4.95,2.65 4.95,3.925 3.55,3.925
GND on Top Layer "GND_L01_P033" (solid, pour order 33): 9.5,33.6 11.7,33.6 11.7,30.6 9.5,30.6
GND on Top Layer "GND_L01_P032" (solid, pour order 32): 3.3,33.6 5.5,33.6 5.5,30.6 3.3,30.6

## Keep-outs
Keep-Out Layer:
  lines w0.254: 0,68.7 0,35 0,1.25 ccw(c1.25,1.25) 1.25,0 13.8,0 ; 0,68.75 cw(c1.25,68.75) 1.25,70 ; 1.2,70 13.75,70 cw(c13.75,68.75) 15,68.75 15,35 15,1.3 ; 13.75,0 ccw(c13.75,1.25) 15,1.25

## Silkscreen, mask and mechanical layers (free items; w line width, h text height)
Top Overlay:
  drawing of 58 lines, arcs and shapes, not listed
  text "+" at 14.55,67.159 h2.5 r180
  text "-" at 1.35,67.077 h3 r180
  text "Ball/Horvath 21/22" at 0.422,58.6 h2 r270
  text "Programmer" at 9.765,55.5 h1.25 r90
  text "BMS-Slave" at 14.578,44.089 h2 r90
  text "B" at 10.8,42 h2 r180
  text "T" at 5,41.979 h2 r180
  text "+" at 12.95,39.209 h2.5 r180
  text "-" at 2.8,38.981 h2.5 r180
  text "-" at 12.2,31.019 h2.5
  text "+" at 2.05,30.791 h2.5
  text "T" at 10,28.021 h2
  text "B" at 4.2,28 h2
  text "BMS-Slave" at 0.422,25.911 h2 r270
  text "Programmer" at 5.235,14.5 h1.25 r270
  text "Ball/Horvath 21/22" at 14.578,11.4 h2 r90
  text "-" at 13.65,2.923 h3
  text "+" at 0.45,2.841 h2.5
Bottom Overlay:
  drawing of 58 lines, arcs and shapes, not listed
  text "-" at 4.5,67.327 h3 r180
  text "+" at 11.5,67.259 h2.5 r180
  text "V1.0" at 0.502,65.728 h2 r180
  text "BMS-Slave" at 0.5,64.178 h2 r180
  text "+" at 12.95,39.209 h2.5 r180
  text "-" at 2.8,38.981 h2.5 r180
  text "T" at 6,37.4 h2 r180
  text "B" at 8,37.4 h2 r180
  text "B" at 7,32.6 h2
  text "T" at 9,32.6 h2
  text "-" at 12.2,31.019 h2.5
  text "+" at 2.05,30.791 h2.5
  text "BMS-Slave" at 14.5,5.822 h2
  text "V1.0" at 14.498,4.272 h2
  text "+" at 3.5,2.741 h2.5
  text "-" at 10.5,2.673 h3